# EAGLE board SparkFun_AzureWave_Module_Thing_Plus_AW-CU488-Panel (EAGLE 9.6.2), part 1 of 3
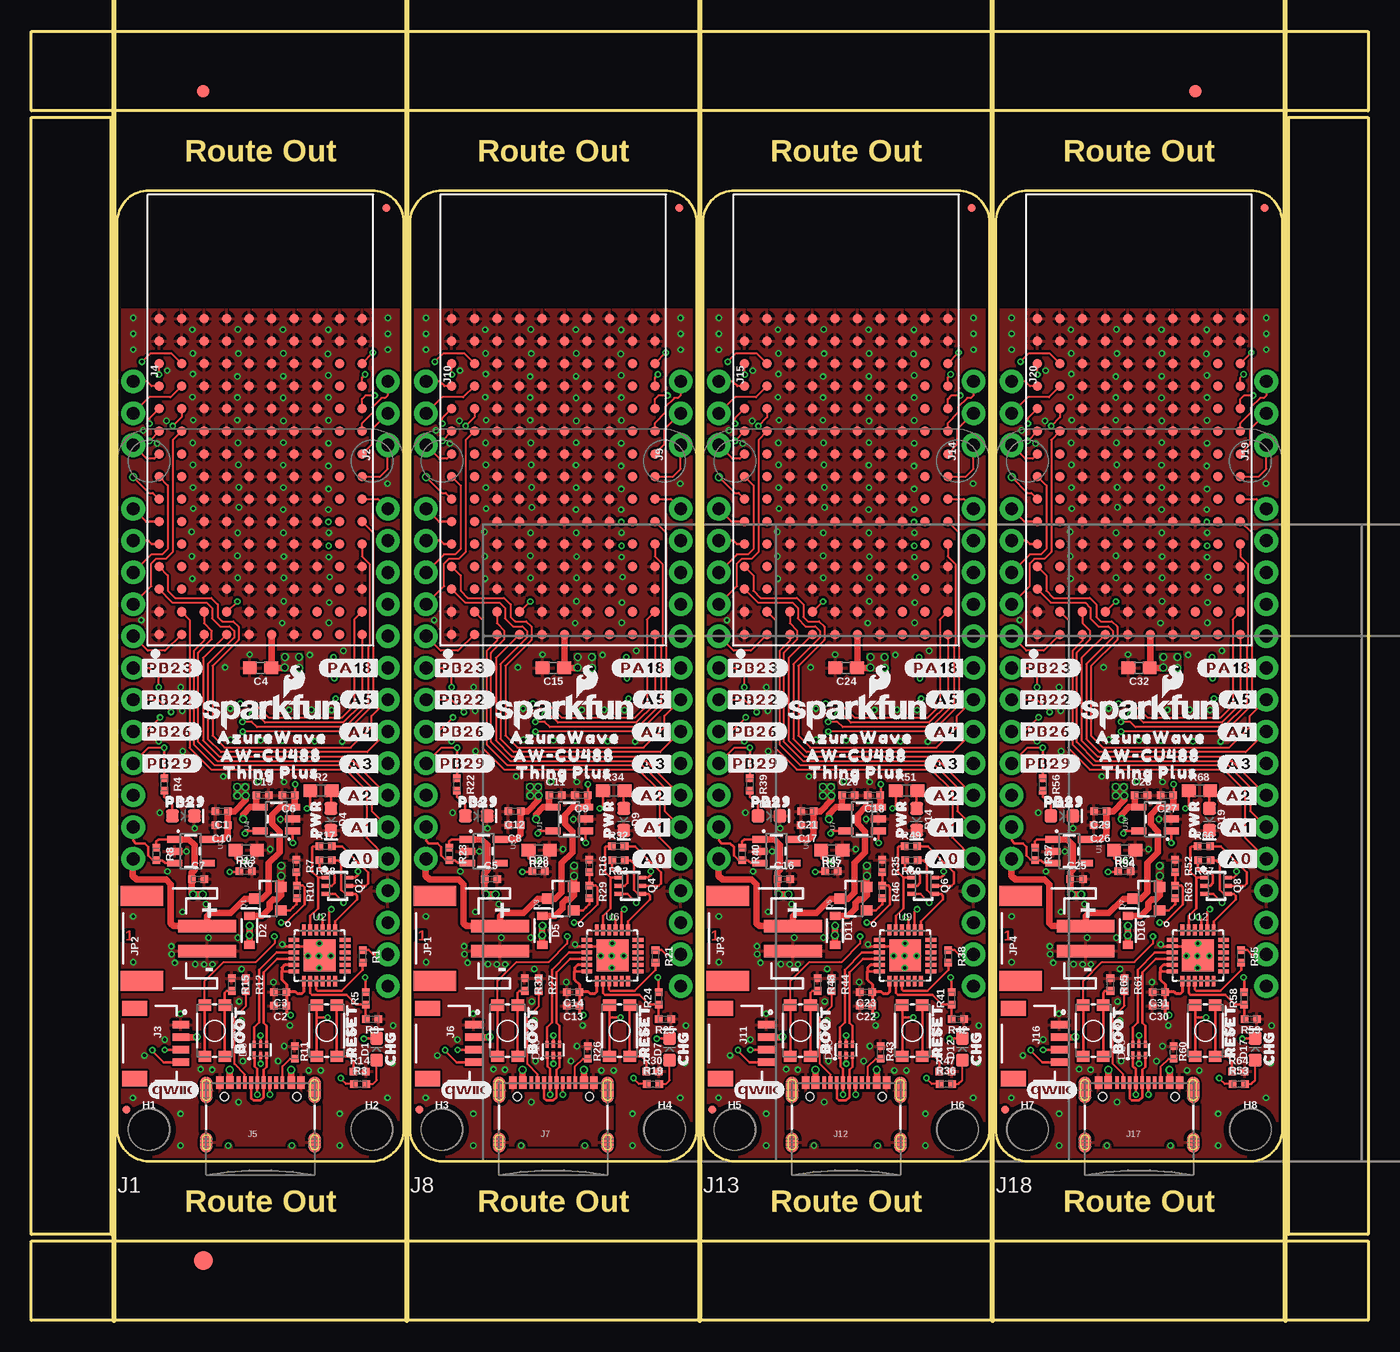
[diagram p0: board, top side]
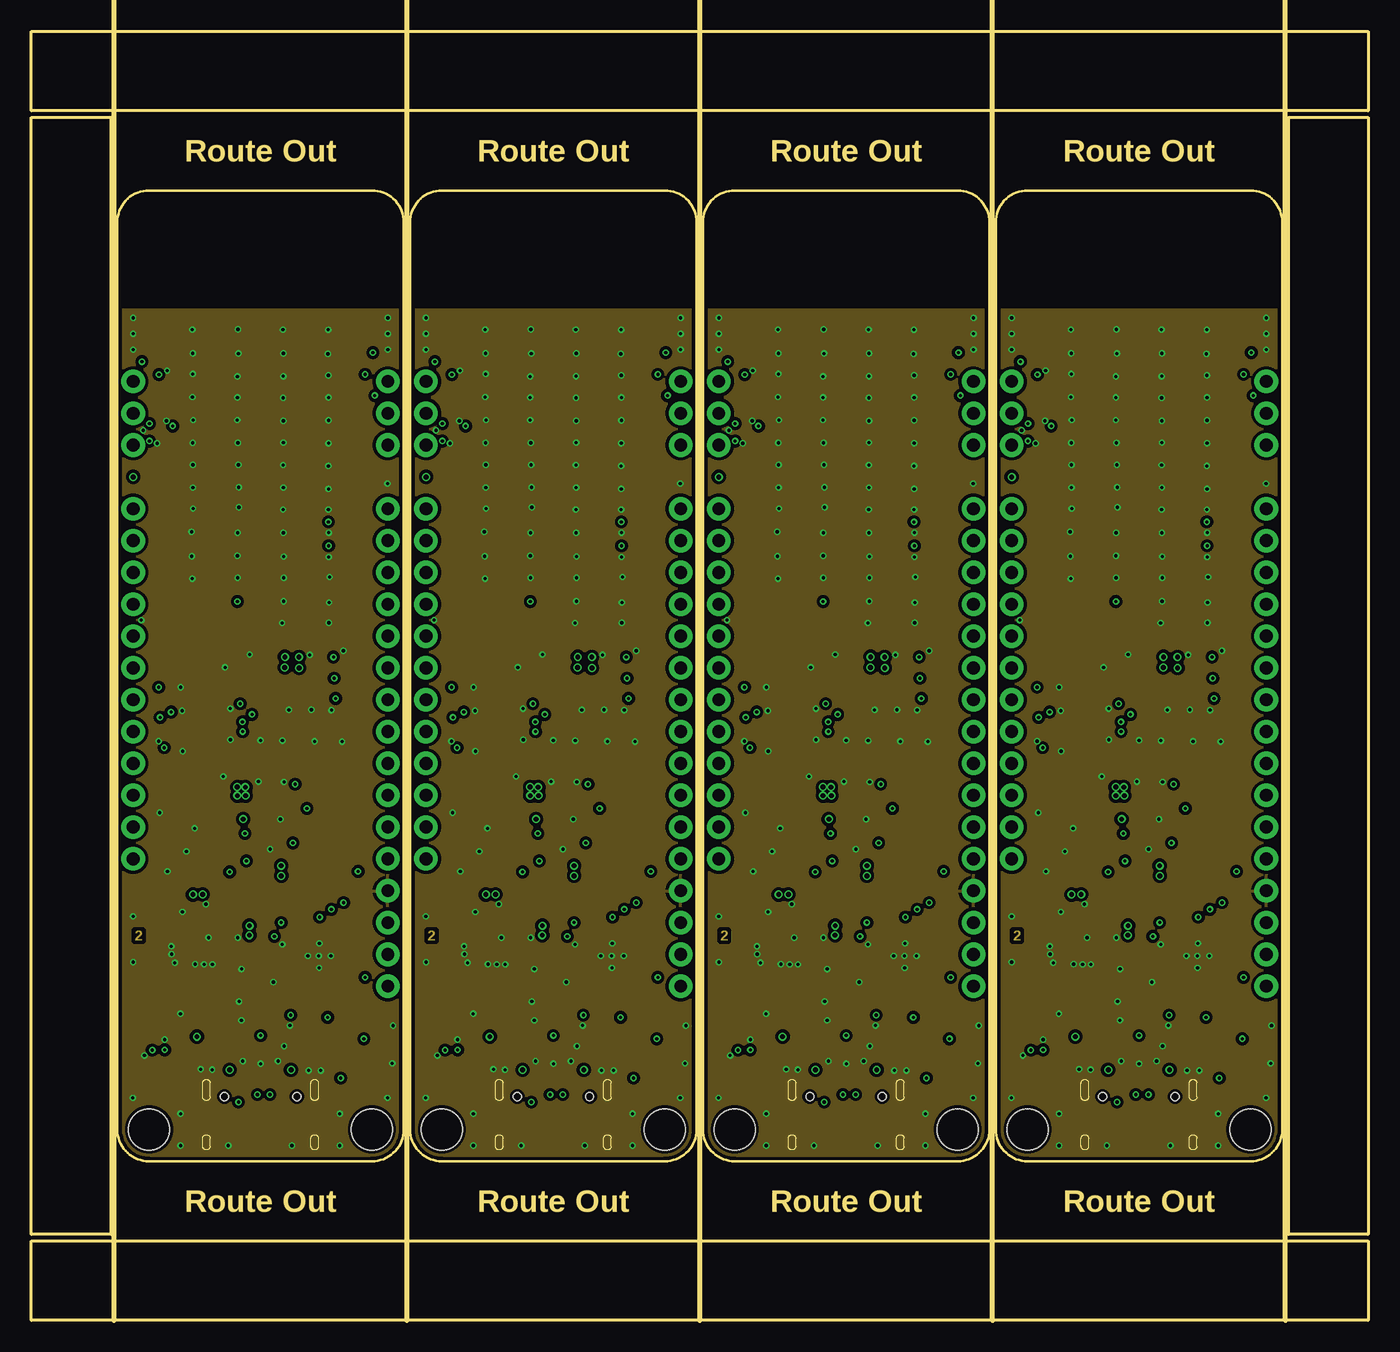
[diagram p1: board, inner layer Route2]
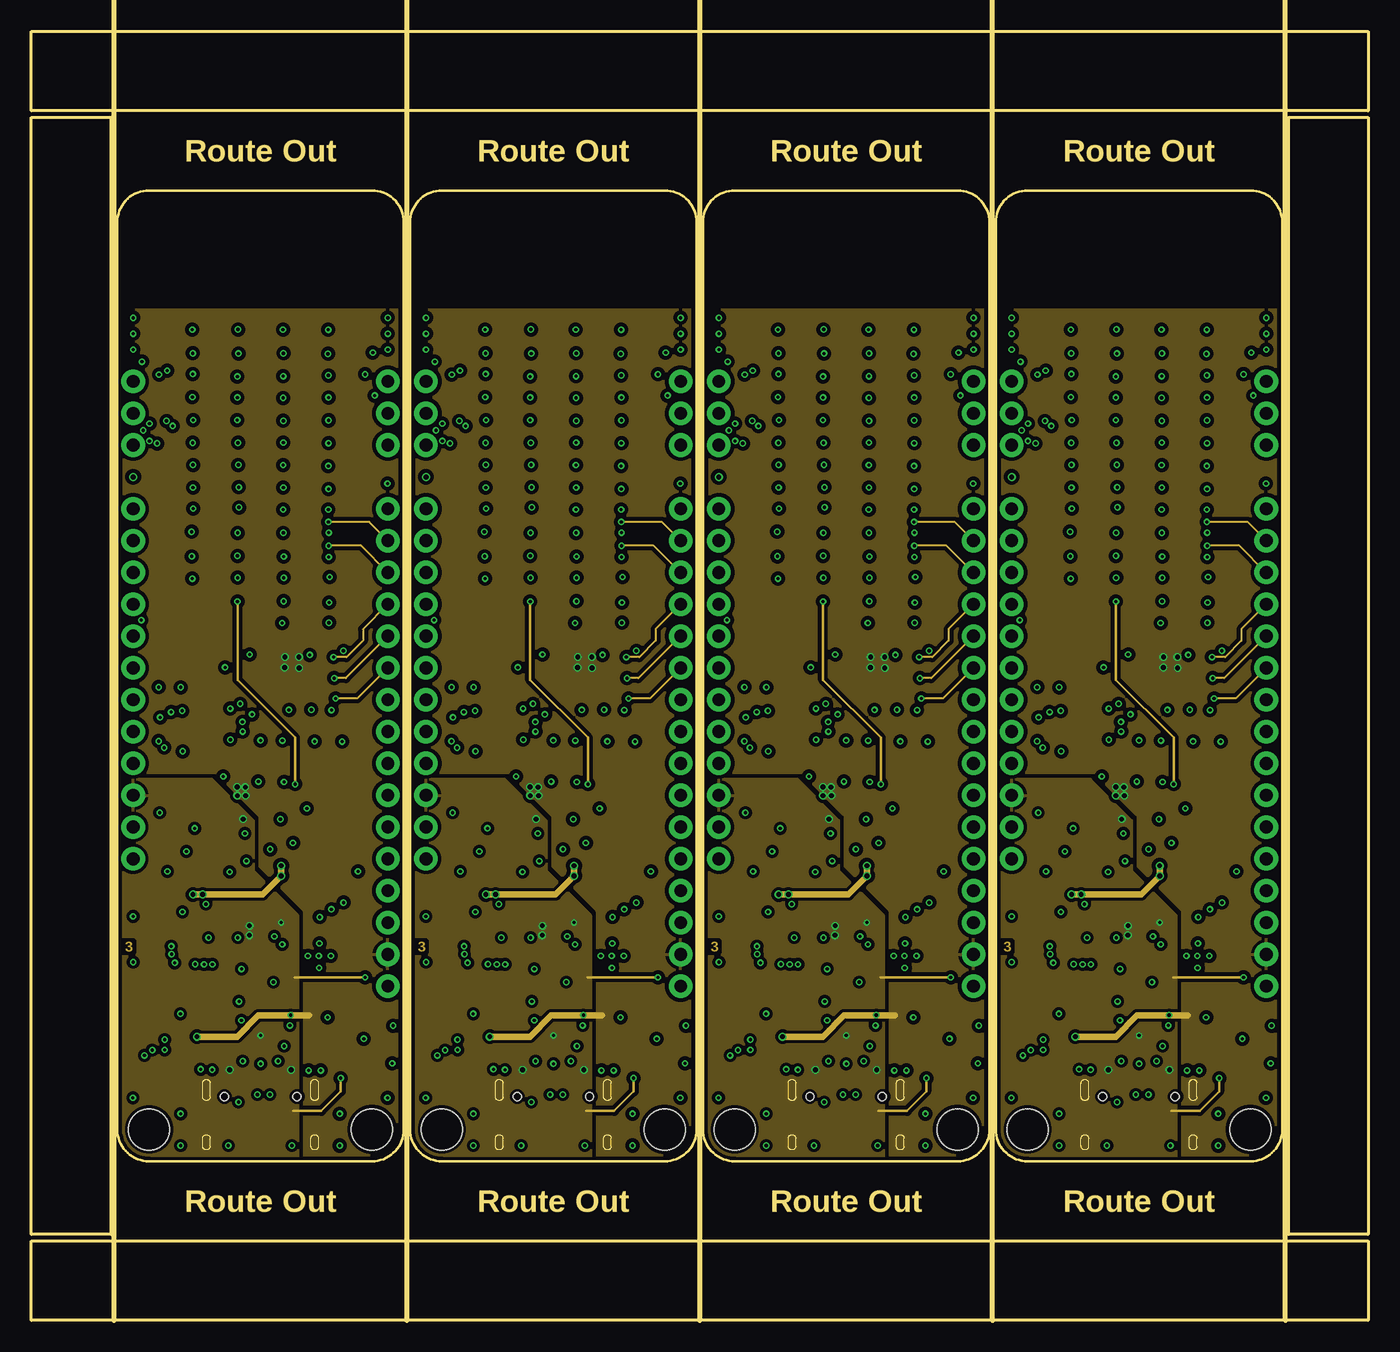
[diagram p2: board, inner layer Route15]
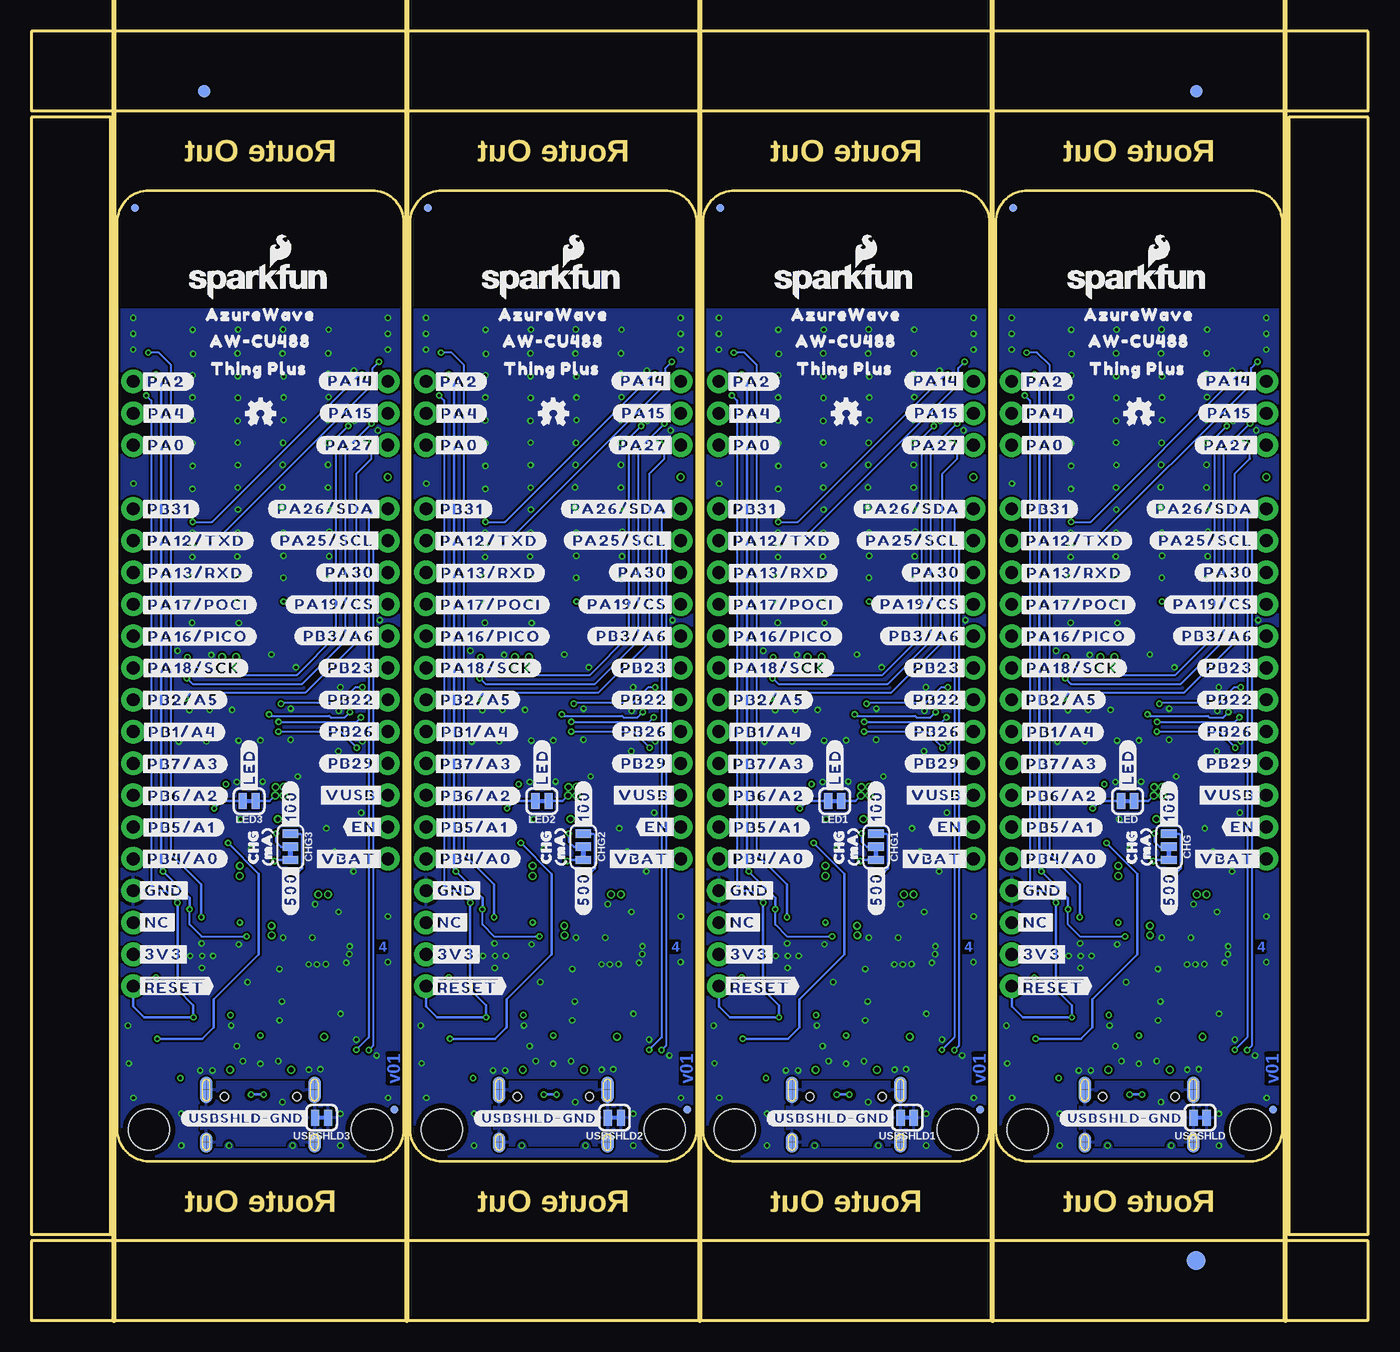
[diagram p3: board, bottom side, seen from below]

Size 106.68 x 102.87 mm. Coordinates in mm from the lower left corner, seen from the top.
Outline: 29.72,15.24 29.72,87.63 arc90 27.18,90.17 9.4,90.17 arc90 6.86,87.63 6.86,15.24 arc90 9.4,12.7 27.18,12.7 arc90 29.72,15.24
Outline: 53.09,15.24 53.09,87.63 arc90 50.55,90.17 32.77,90.17 arc90 30.23,87.63 30.23,15.24 arc90 32.77,12.7 50.55,12.7 arc90 53.09,15.24
Outline: 76.45,15.24 76.45,87.63 arc90 73.91,90.17 56.13,90.17 arc90 53.59,87.63 53.59,15.24 arc90 56.13,12.7 73.91,12.7 arc90 76.45,15.24
Outline: 99.82,15.24 99.82,87.63 arc90 97.28,90.17 79.5,90.17 arc90 76.96,87.63 76.96,15.24 arc90 79.5,12.7 97.28,12.7 arc90 99.82,15.24
Outline: 0,6.35 106.68,6.35 106.68,0 0,0 0,6.35
Outline: 100.33,96.01 106.68,96.01 106.68,6.86 100.33,6.86 100.33,96.01
Outline: 0,102.87 106.68,102.87 106.68,96.52 0,96.52 0,102.87
Outline: 0,96.01 6.35,96.01 6.35,6.86 0,6.86 0,96.01
Copper layers (1*2*15*16): Top 0.035559375mm / dielectric 0.47751875mm / Route2 0.035559375mm / dielectric 0.47751875mm / Route15 0.035559375mm / dielectric 0.47751875mm / Bottom 0.035559375mm
Design rules "SparkFun_AzureWave_Module_Thing_Plus_AW-CU488": minimum track width 5mil, minimum drill 0.2mm, track to track 5mil, track to pad 5mil, pad to pad 5mil, via to via 5mil, smd to smd 5mil, copper to edge 7mil, drill to drill 7mil, minimum pad ring 5mil, minimum via ring 5mil, stop-mask expansion 2.5mil, vias tented up to drill 25mil, thermal gap 10mil
tRestrict: area 24.4,29 to 24.4,29.2; area 21.6,29 to 21.6,29.3; area 22.9,27.7 to 23.1,27.8; area 22.8,30.5 to 23.1,30.5; area 47.7,29 to 47.8,29.2; area 44.9,29 to 45,29.3; area 46.2,27.7 to 46.5,27.8; area 46.2,30.5 to 46.5,30.5; area 71.1,29 to 71.2,29.2; area 68.3,29 to 68.4,29.3; area 69.6,27.7 to 69.8,27.8; area 69.6,30.5 to 69.8,30.5; 4 more areas
Milling: 5 lines

## Footprints (pad centres in the part's own frame; a part is rotated, then mirrored left to right if it is on the bottom)
0402-TIGHT = smd 0.6 x 0.6: 1 -0.5,0; 2 0.5,0
0603 = smd 1.1 x 1: 1 -0.85,0; 2 0.85,0
SMT-JUMPER_3_1-NC_TRACE_SILK = smd 0.66 x 1.27: 1 -1.041,0; 2 0,0; 3 1.041,0
LED-0603 = smd 1 x 1: A -0.877,0; C 0.877,0
SOD-323 = smd 0.63 x 0.83: A 1.15,0; C -1.15,0
SOT886 = smd 0.61 x 0.25: 1 -0.405,0.5 | smd 0.56 x 0.25: 2 -0.43,0; 3 -0.43,-0.5; 4 0.43,-0.5; 5 0.43,0; 6 0.43,0.5
FIDUCIAL-1X2 = smd 1 x 1: 1 0,0
FIDUCIAL-1.5X3 = smd 1.5 x 1.5: 1 0,0
FIDUCIAL-MICRO = smd 0.635 x 0.635: 1 0,0
STAND-OFF = hole 3.302: 0,0
THING_PLUS = drill 1.016 pad 1.88: 1 1.27,52.07; 2 1.27,49.53; 3 1.27,46.99; 4 1.27,44.45; 5 1.27,41.91; 6 1.27,39.37; 7 1.27,36.83; 8 1.27,34.29; 9 1.27,31.75; 10 1.27,29.21; 11 1.27,26.67; 12 1.27,24.13; 13 21.59,52.07; 14 21.59,49.53; 15 21.59,46.99; 16 21.59,44.45; 17 21.59,41.91; 18 21.59,39.37; 19 21.59,36.83; 20 21.59,34.29; 21 21.59,31.75; 22 21.59,29.21; 23 21.59,26.67; 24 21.59,24.13; 25 21.59,21.59; 26 21.59,19.05; 27 21.59,16.51; 28 21.59,13.97
1X03_NO_SILK = drill 1.016 pad 1.88: 1 0,0; 2 2.54,0; 3 5.08,0
JST04_1MM_RA = smd 0.6 x 1.35: 1 -1.5,0; 2 -0.5,0; 3 0.5,0; 4 1.5,0 | smd 1.2 x 2: NC1 2.8,-3.675; NC2 -2.8,-3.675
USB-C-16P-4LAYER-ISOLATED = smd 0.3 x 1: A5 -1.25,-0.34; A6 -0.25,-0.34; A7 0.25,-0.34; A8 1.25,-0.34; B5 1.75,-0.34; B6 0.75,-0.34; B7 -0.75,-0.34; B8 -1.75,-0.34 | smd 0.6 x 1: GND -3.225,-0.34; GND2 3.225,-0.34; VBUS1 -2.45,-0.34; VBUS2 2.45,-0.34 | smd 1 x 2.1: SHLD1 -4.32,-0.915; SHLD2 4.32,-0.915 | smd 1 x 2.1 bottom: SHLD3 -4.32,-0.915; SHLD4 4.32,-0.915 | smd 1 x 1.6: SHLD5 -4.32,-5.095; SHLD8 4.32,-5.095 | smd 1 x 1.6 bottom: SHLD6 -4.32,-5.095; SHLD7 4.32,-5.095 | hole 0.65: -2.89,-1.445; 2.89,-1.445
JST-2-SMD = smd 1 x 4.6: 1 -1,-3.7; 2 1,-3.7 | smd 1.6 x 3.4: NC1 -3.4,1.5; NC2 3.4,1.5
SMT-JUMPER_2_NC_TRACE_SILK = smd 0.66 x 1.27: 1 -0.521,0; 2 0.521,0
SOT23-3 = smd 0.8 x 0.9: 1 -0.95,-1; 2 0.95,-1; 3 0,1.1
SC70-6 = smd 0.3 x 0.66: 1 -0.65,-0.92; 2 0,-0.92; 3 0.65,-0.92; 4 0.65,0.92; 5 0,0.92; 6 -0.65,0.92
TACTILE_SWITCH_SMD_4.6X2.8MM = smd 0.9 x 1: 1 -2.05,-0.8; 2 2.05,-0.8; 3 2.05,0.8; 4 -2.05,0.8
TP_15TH = drill 0.381 pad 0.61: 1 0,0
SOT23-5 = smd 0.55 x 1.2: 1 -0.95,-1.3; 2 0,-1.3; 3 0.95,-1.3; 4 0.95,1.3; 5 -0.95,1.3
QFN24 = smd 0.85 x 0.3: 1 -2.05,1.25; 2 -2.05,0.75; 3 -2.05,0.25; 4 -2.05,-0.25; 5 -2.05,-0.75; 6 -2.05,-1.25; 13 2.05,-1.25; 14 2.05,-0.75; 15 2.05,-0.25; 16 2.05,0.25; 17 2.05,0.75; 18 2.05,1.25 | smd 0.3 x 0.85: 7 -1.25,-2.05; 8 -0.75,-2.05; 9 -0.25,-2.05; 10 0.25,-2.05; 11 0.75,-2.05; 12 1.25,-2.05; 19 1.25,2.05; 20 0.75,2.05; 21 0.25,2.05; 22 -0.25,2.05; 23 -0.75,2.05; 24 -1.25,2.05 | smd 2.55 x 2.55: PAD 0,0
LGA150_AW-CU488 = smd 0.75 x 0.75: A1 15.1,-8.1; A2 13.3,-8.1; A3 11.5,-8.1; A4 9.7,-8.1; A5 7.9,-8.1; A6 6.1,-8.1; A7 4.3,-8.1; A8 2.5,-8.1; A9 0.7,-8.1; A10 -1.1,-8.1; A11 -2.9,-8.1; A12 -4.7,-8.1; A13 -6.5,-8.1; A14 -8.3,-8.1; A15 -10.1,-8.1; B1 15.1,-6.3; B2 13.3,-6.3; B3 11.5,-6.3; B4 9.7,-6.3; B5 7.9,-6.3; B6 6.1,-6.3; B7 4.3,-6.3; B8 2.5,-6.3; B9 0.7,-6.3; B10 -1.1,-6.3; B11 -2.9,-6.3; B12 -4.7,-6.3; B13 -6.5,-6.3; B14 -8.3,-6.3; B15 -10.1,-6.3; C1 15.1,-4.5; C2 13.3,-4.5; C3 11.5,-4.5; C4 9.7,-4.5; C5 7.9,-4.5; C6 6.1,-4.5; C7 4.3,-4.5; C8 2.5,-4.5; C9 0.7,-4.5; C10 -1.1,-4.5; C11 -2.9,-4.5; C12 -4.7,-4.5; C13 -6.5,-4.5; C14 -8.3,-4.5; C15 -10.1,-4.5; D1 15.1,-2.7; D2 13.3,-2.7; D3 11.5,-2.7; D4 9.7,-2.7; D5 7.9,-2.7; D6 6.1,-2.7; D7 4.3,-2.7; D8 2.5,-2.7; D9 0.7,-2.7; D10 -1.1,-2.7; D11 -2.9,-2.7; D12 -4.7,-2.7; D13 -6.5,-2.7; D14 -8.3,-2.7; D15 -10.1,-2.7; E1 15.1,-0.9; E2 13.3,-0.9; E3 11.5,-0.9; E4 9.7,-0.9; E5 7.9,-0.9; E6 6.1,-0.9; E7 4.3,-0.9; E8 2.5,-0.9; E9 0.7,-0.9; E10 -1.1,-0.9; E11 -2.9,-0.9; E12 -4.7,-0.9; E13 -6.5,-0.9; E14 -8.3,-0.9; E15 -10.1,-0.9; F1 15.1,0.9; F2 13.3,0.9; F3 11.5,0.9; F4 9.7,0.9; F5 7.9,0.9; F6 6.1,0.9; F7 4.3,0.9; F8 2.5,0.9; F9 0.7,0.9; F10 -1.1,0.9; F11 -2.9,0.9; F12 -4.7,0.9; F13 -6.5,0.9; F14 -8.3,0.9; F15 -10.1,0.9; G1 15.1,2.7; G2 13.3,2.7; G3 11.5,2.7; G4 9.7,2.7; G5 7.9,2.7; G6 6.1,2.7; G7 4.3,2.7; G8 2.5,2.7; G9 0.7,2.7; G10 -1.1,2.7; G11 -2.9,2.7; G12 -4.7,2.7; G13 -6.5,2.7; G14 -8.3,2.7; G15 -10.1,2.7; H1 15.1,4.5; H2 13.3,4.5; H3 11.5,4.5; H4 9.7,4.5; H5 7.9,4.5; H6 6.1,4.5; H7 4.3,4.5; H8 2.5,4.5; H9 0.7,4.5; H10 -1.1,4.5; H11 -2.9,4.5; H12 -4.7,4.5; H13 -6.5,4.5; H14 -8.3,4.5; H15 -10.1,4.5; J1 15.1,6.3; J2 13.3,6.3; J3 11.5,6.3; J4 9.7,6.3; J5 7.9,6.3; J6 6.1,6.3; J7 4.3,6.3; J8 2.5,6.3; J9 0.7,6.3; J10 -1.1,6.3; J11 -2.9,6.3; J12 -4.7,6.3; J13 -6.5,6.3; J14 -8.3,6.3; J15 -10.1,6.3; K1 15.1,8.1; K2 13.3,8.1; K3 11.5,8.1; K4 9.7,8.1; K5 7.9,8.1; K6 6.1,8.1; K7 4.3,8.1; K8 2.5,8.1; K9 0.7,8.1; K10 -1.1,8.1; K11 -2.9,8.1; K12 -4.7,8.1; K13 -6.5,8.1; K14 -8.3,8.1; K15 -10.1,8.1

## Placement (x,y rotation side)
C1  10uF  [0402-TIGHT]  15.19,40.63 180 top
C2  0.1uF  [0402-TIGHT]  19.87,25.12 180 top
C3  4.7uF  [0402-TIGHT]  19.87,26.21 180 top
C4  10uF  [0603]  18.29,52.07 180 top
C5  1.0uF  [0402-TIGHT]  36.68,35.23 0 top
C6  4.7uF  [0402-TIGHT]  20.52,41.9 180 top
C7  1.0uF  [0402-TIGHT]  13.31,35.23 0 top
C8  1.0uF  [0402-TIGHT]  38.55,39.54 180 top
C9  4.7uF  [0402-TIGHT]  43.89,41.9 180 top
C10  1.0uF  [0402-TIGHT]  15.18,39.54 180 top
C11  4.7uF  [0402-TIGHT]  41.82,41.91 0 top
C12  10uF  [0402-TIGHT]  38.56,40.63 180 top
C13  0.1uF  [0402-TIGHT]  43.24,25.12 180 top
C14  4.7uF  [0402-TIGHT]  43.24,26.21 180 top
C15  10uF  [0603]  41.66,52.07 180 top
C16  1.0uF  [0402-TIGHT]  60.05,35.23 0 top
C17  1.0uF  [0402-TIGHT]  61.92,39.54 180 top
C18  4.7uF  [0402-TIGHT]  67.26,41.9 180 top
C19  4.7uF  [0402-TIGHT]  18.45,41.91 0 top
C20  4.7uF  [0402-TIGHT]  65.19,41.91 0 top
C21  10uF  [0402-TIGHT]  61.93,40.63 180 top
C22  0.1uF  [0402-TIGHT]  66.6,25.12 180 top
C23  4.7uF  [0402-TIGHT]  66.61,26.21 180 top
C24  10uF  [0603]  65.02,52.07 180 top
C25  1.0uF  [0402-TIGHT]  83.41,35.23 0 top
C26  1.0uF  [0402-TIGHT]  85.29,39.54 180 top
C27  4.7uF  [0402-TIGHT]  90.62,41.9 180 top
C28  4.7uF  [0402-TIGHT]  88.56,41.91 0 top
C29  10uF  [0402-TIGHT]  85.3,40.63 180 top
C30  0.1uF  [0402-TIGHT]  89.97,25.12 180 top
C31  4.7uF  [0402-TIGHT]  89.97,26.21 180 top
C32  10uF  [0603]  88.39,52.07 180 top
CHG  [SMT-JUMPER_3_1-NC_TRACE_SILK]  15.9,37.8 270 bottom
CHG1  [SMT-JUMPER_3_1-NC_TRACE_SILK]  39.27,37.8 270 bottom
CHG2  [SMT-JUMPER_3_1-NC_TRACE_SILK]  62.64,37.8 270 bottom
CHG3  [SMT-JUMPER_3_1-NC_TRACE_SILK]  86,37.8 270 bottom
D1  Yellow  [LED-0603]  27.56,21.64 90 top
D2  1A/23V/620mV  [SOD-323]  17.4,31.11 270 top
D3  BLUE  [LED-0603]  12.14,40.26 0 top
D4  RED  [LED-0603]  23.91,39.97 270 top
D5  1A/23V/620mV  [SOD-323]  40.77,31.11 270 top
D6  PRTR5V0U2F  [SOT886]  18.29,21.59 90 top
D7  Yellow  [LED-0603]  50.93,21.64 90 top
D8  BLUE  [LED-0603]  35.5,40.26 0 top
D9  RED  [LED-0603]  47.28,39.97 270 top
D10  PRTR5V0U2F  [SOT886]  41.66,21.59 90 top
D11  1A/23V/620mV  [SOD-323]  64.14,31.11 270 top
D12  Yellow  [LED-0603]  74.3,21.64 90 top
D13  BLUE  [LED-0603]  58.87,40.26 0 top
D14  RED  [LED-0603]  70.65,39.97 270 top
D15  PRTR5V0U2F  [SOT886]  65.02,21.59 90 top
D16  1A/23V/620mV  [SOD-323]  87.5,31.11 270 top
D17  Yellow  [LED-0603]  97.66,21.64 90 top
D18  BLUE  [LED-0603]  82.24,40.26 0 top
D19  RED  [LED-0603]  94.01,39.97 270 top
D20  PRTR5V0U2F  [SOT886]  88.39,21.59 90 top
E$1  [FIDUCIAL-1X2]  13.72,98.11 0 top
E$2  [FIDUCIAL-1X2]  13.72,98.11 0 bottom
E$3  [FIDUCIAL-1X2]  92.9,98.11 0 top
E$4  [FIDUCIAL-1X2]  92.9,98.11 0 bottom
E$5  [FIDUCIAL-1.5X3]  13.72,4.76 0 top
E$6  [FIDUCIAL-1.5X3]  13.72,4.76 0 bottom
FD1  FIDUCIALUFIDUCIAL  [FIDUCIAL-MICRO]  28.32,88.77 0 top
FD2  FIDUCIALUFIDUCIAL  [FIDUCIAL-MICRO]  28.32,88.77 0 bottom
FD3  FIDUCIALUFIDUCIAL  [FIDUCIAL-MICRO]  7.6,16.84 0 top
FD4  FIDUCIALUFIDUCIAL  [FIDUCIAL-MICRO]  7.6,16.84 0 bottom
FD5  FIDUCIALUFIDUCIAL  [FIDUCIAL-MICRO]  51.69,88.77 0 top
FD6  FIDUCIALUFIDUCIAL  [FIDUCIAL-MICRO]  51.69,88.77 0 bottom
FD7  FIDUCIALUFIDUCIAL  [FIDUCIAL-MICRO]  30.97,16.84 0 top
FD8  FIDUCIALUFIDUCIAL  [FIDUCIAL-MICRO]  30.97,16.84 0 bottom
FD9  FIDUCIALUFIDUCIAL  [FIDUCIAL-MICRO]  75.06,88.77 0 top
FD10  FIDUCIALUFIDUCIAL  [FIDUCIAL-MICRO]  75.06,88.77 0 bottom
FD11  FIDUCIALUFIDUCIAL  [FIDUCIAL-MICRO]  54.34,16.84 0 top
FD12  FIDUCIALUFIDUCIAL  [FIDUCIAL-MICRO]  54.34,16.84 0 bottom
FD13  FIDUCIALUFIDUCIAL  [FIDUCIAL-MICRO]  98.42,88.77 0 top
FD14  FIDUCIALUFIDUCIAL  [FIDUCIAL-MICRO]  98.42,88.77 0 bottom
FD15  FIDUCIALUFIDUCIAL  [FIDUCIAL-MICRO]  77.71,16.84 0 top
FD16  FIDUCIALUFIDUCIAL  [FIDUCIAL-MICRO]  77.71,16.84 0 bottom
H1  STAND-OFF  [STAND-OFF]  9.4,15.24 0 top
H2  STAND-OFF  [STAND-OFF]  27.18,15.24 0 top
H3  STAND-OFF  [STAND-OFF]  32.77,15.24 0 top
H4  STAND-OFF  [STAND-OFF]  50.55,15.24 0 top
H5  STAND-OFF  [STAND-OFF]  56.13,15.24 0 top
H6  STAND-OFF  [STAND-OFF]  73.91,15.24 0 top
H7  STAND-OFF  [STAND-OFF]  79.5,15.24 0 top
H8  STAND-OFF  [STAND-OFF]  97.28,15.24 0 top
J1  THING_PLUS  [THING_PLUS]  6.86,12.7 0 top
J2  [1X03_NO_SILK]  28.45,69.85 90 top
J3  QWIIC_RA  [JST04_1MM_RA]  11.94,22.1 270 top
J4  [1X03_NO_SILK]  8.13,74.93 270 top
J5  USB-C  [USB-C-16P-4LAYER-ISOLATED]  18.29,19.3 0 top
J6  QWIIC_RA  [JST04_1MM_RA]  35.31,22.1 270 top
J7  USB-C  [USB-C-16P-4LAYER-ISOLATED]  41.66,19.3 0 top
J8  THING_PLUS  [THING_PLUS]  30.23,12.7 0 top
J9  [1X03_NO_SILK]  51.82,69.85 90 top
J10  [1X03_NO_SILK]  31.5,74.93 270 top
J11  QWIIC_RA  [JST04_1MM_RA]  58.67,22.1 270 top
J12  USB-C  [USB-C-16P-4LAYER-ISOLATED]  65.02,19.3 0 top
J13  THING_PLUS  [THING_PLUS]  53.59,12.7 0 top
J14  [1X03_NO_SILK]  75.18,69.85 90 top
J15  [1X03_NO_SILK]  54.86,74.93 270 top
J16  QWIIC_RA  [JST04_1MM_RA]  82.04,22.1 270 top
J17  USB-C  [USB-C-16P-4LAYER-ISOLATED]  88.39,19.3 0 top
J18  THING_PLUS  [THING_PLUS]  76.96,12.7 0 top
J19  [1X03_NO_SILK]  98.55,69.85 90 top
J20  [1X03_NO_SILK]  78.23,74.93 270 top
JP1  LiPo  [JST-2-SMD]  33.71,30.48 90 top
JP2  LiPo  [JST-2-SMD]  10.34,30.48 90 top
JP3  LiPo  [JST-2-SMD]  57.07,30.48 90 top
JP4  LiPo  [JST-2-SMD]  80.44,30.48 90 top
LED  [SMT-JUMPER_2_NC_TRACE_SILK]  19.19,41.44 180 bottom
LED1  [SMT-JUMPER_2_NC_TRACE_SILK]  42.56,41.44 180 bottom
LED2  [SMT-JUMPER_2_NC_TRACE_SILK]  65.93,41.44 180 bottom
LED3  [SMT-JUMPER_2_NC_TRACE_SILK]  89.3,41.44 180 bottom
LOGO1  OSHW-LOGOMINI  [OSHW-LOGO-MINI]  41.66,72.39 0 bottom
LOGO2  OSHW-LOGOMINI  [OSHW-LOGO-MINI]  18.29,72.39 0 bottom
LOGO3  SFE_LOGO_NAME_FLAME.1_INCH  [SFE_LOGO_NAME_FLAME_.1]  18.42,82.93 0 bottom
LOGO4  FOUR_LAYER_WARNING  [FOUR_LAYER_WARNING]  37.34,52.07 0 top
LOGO5  SFE_LOGO_NAME_FLAME.1_INCH  [SFE_LOGO_NAME_FLAME_.1]  19.25,48.59 0 top
LOGO6  QWIIC_LOGO_4MM  [QWIIC_4MM]  11.36,18.37 0 top
LOGO7  SFE_LOGO_NAME_FLAME.1_INCH  [SFE_LOGO_NAME_FLAME_.1]  41.79,82.93 0 bottom
LOGO8  FOUR_LAYER_WARNING  [FOUR_LAYER_WARNING]  60.71,52.07 0 top
LOGO9  QWIIC_LOGO_4MM  [QWIIC_4MM]  34.73,18.37 0 top
LOGO10  SFE_LOGO_NAME_FLAME.1_INCH  [SFE_LOGO_NAME_FLAME_.1]  42.61,48.59 0 top
LOGO11  OSHW-LOGOMINI  [OSHW-LOGO-MINI]  65.02,72.39 0 bottom
LOGO12  SFE_LOGO_NAME_FLAME.1_INCH  [SFE_LOGO_NAME_FLAME_.1]  65.16,82.93 0 bottom
LOGO13  FOUR_LAYER_WARNING  [FOUR_LAYER_WARNING]  84.07,52.07 0 top
LOGO14  QWIIC_LOGO_4MM  [QWIIC_4MM]  58.1,18.37 0 top
LOGO15  SFE_LOGO_NAME_FLAME.1_INCH  [SFE_LOGO_NAME_FLAME_.1]  65.98,48.59 0 top
LOGO16  OSHW-LOGOMINI  [OSHW-LOGO-MINI]  88.39,72.39 0 bottom
LOGO17  SFE_LOGO_NAME_FLAME.1_INCH  [SFE_LOGO_NAME_FLAME_.1]  88.53,82.93 0 bottom
LOGO18  FOUR_LAYER_WARNING  [FOUR_LAYER_WARNING]  107.44,52.07 0 top
LOGO19  QWIIC_LOGO_4MM  [QWIIC_4MM]  81.47,18.37 0 top
LOGO20  SFE_LOGO_NAME_FLAME.1_INCH  [SFE_LOGO_NAME_FLAME_.1]  89.35,48.59 0 top
Q1  3.1A/30V/105mΩ  [SOT23-3]  18.92,33.66 90 top
Q2  MBT3904DW1T1  [SC70-6]  24.43,34.68 270 top
Q3  3.1A/30V/105mΩ  [SOT23-3]  42.29,33.66 90 top
Q4  MBT3904DW1T1  [SC70-6]  47.8,34.68 270 top
Q5  3.1A/30V/105mΩ  [SOT23-3]  65.66,33.66 90 top
Q6  MBT3904DW1T1  [SC70-6]  71.17,34.68 270 top
Q7  3.1A/30V/105mΩ  [SOT23-3]  89.03,33.66 90 top
Q8  MBT3904DW1T1  [SC70-6]  94.54,34.68 270 top
R1  10k  [0402-TIGHT]  26.44,29.05 270 top
R2  4.7k  [0603]  23.11,42.29 0 top
R3  1k  [0402-TIGHT]  26.25,18.86 0 top
R4  1k  [0402-TIGHT]  10.6,42.77 270 top
R5  22k  [0402-TIGHT]  26.69,25.71 90 top
R6  2.0k  [0603]  17.15,37.53 180 top
R7  10k  [0402-TIGHT]  21.17,36.27 270 top
R8  100k  [0402-TIGHT]  9.98,37.21 270 top
R9  33k  [0402-TIGHT]  27.2,24.05 180 top
R10  100  [0402-TIGHT]  21.17,34.2 270 top
R11  5.1k  [0402-TIGHT]  21.03,21.39 270 top
R12  5.1k  [0402-TIGHT]  17.14,26.79 270 top
R13  10k  [0402-TIGHT]  17.12,35.84 0 top
R14  10k  [0402-TIGHT]  26.21,19.87 0 top
R15  1k  [0402-TIGHT]  16,26.8 270 top
R16  10k  [0402-TIGHT]  44.54,36.27 270 top
R17  10k  [0402-TIGHT]  23.47,37.83 0 top
R18  10k  [0402-TIGHT]  23.49,36.72 180 top
R19  1k  [0402-TIGHT]  49.62,18.86 0 top
R20  2.0k  [0603]  40.52,37.53 180 top
R21  10k  [0402-TIGHT]  49.81,29.05 270 top
R22  1k  [0402-TIGHT]  33.97,42.77 270 top
R23  100k  [0402-TIGHT]  33.35,37.21 270 top
R24  22k  [0402-TIGHT]  50.06,25.71 90 top
R25  33k  [0402-TIGHT]  50.56,24.05 180 top
R26  5.1k  [0402-TIGHT]  44.4,21.39 270 top
R27  5.1k  [0402-TIGHT]  40.51,26.79 270 top
R28  10k  [0402-TIGHT]  40.49,35.84 0 top
R29  100  [0402-TIGHT]  44.54,34.2 270 top
R30  10k  [0402-TIGHT]  49.58,19.87 0 top
R31  1k  [0402-TIGHT]  39.37,26.8 270 top
R32  10k  [0402-TIGHT]  46.84,37.83 0 top
R33  10k  [0402-TIGHT]  46.86,36.72 180 top
R34  4.7k  [0603]  46.48,42.29 0 top
R35  10k  [0402-TIGHT]  67.9,36.27 270 top
R36  1k  [0402-TIGHT]  72.98,18.86 0 top
R37  2.0k  [0603]  63.89,37.53 180 top
R38  10k  [0402-TIGHT]  73.18,29.05 270 top
R39  1k  [0402-TIGHT]  57.34,42.77 270 top
R40  100k  [0402-TIGHT]  56.72,37.21 270 top
R41  22k  [0402-TIGHT]  73.43,25.71 90 top
R42  33k  [0402-TIGHT]  73.93,24.05 180 top
R43  5.1k  [0402-TIGHT]  67.77,21.39 270 top
R44  5.1k  [0402-TIGHT]  63.87,26.79 270 top
R45  10k  [0402-TIGHT]  63.86,35.84 0 top
R46  100  [0402-TIGHT]  67.91,34.2 270 top
R47  10k  [0402-TIGHT]  72.95,19.87 0 top
R48  1k  [0402-TIGHT]  62.74,26.8 270 top
R49  10k  [0402-TIGHT]  70.21,37.83 0 top
R50  10k  [0402-TIGHT]  70.22,36.72 180 top
R51  4.7k  [0603]  69.85,42.29 0 top
R52  10k  [0402-TIGHT]  91.27,36.27 270 top
R53  1k  [0402-TIGHT]  96.35,18.86 0 top
R54  2.0k  [0603]  87.26,37.53 180 top
R55  10k  [0402-TIGHT]  96.55,29.05 270 top
R56  1k  [0402-TIGHT]  80.71,42.77 270 top
R57  100k  [0402-TIGHT]  80.09,37.21 270 top
R58  22k  [0402-TIGHT]  96.79,25.71 90 top
R59  33k  [0402-TIGHT]  97.3,24.05 180 top
R60  5.1k  [0402-TIGHT]  91.14,21.39 270 top
R61  5.1k  [0402-TIGHT]  87.24,26.79 270 top
R62  10k  [0402-TIGHT]  87.22,35.84 0 top
R63  100  [0402-TIGHT]  91.28,34.2 270 top
R64  10k  [0402-TIGHT]  96.32,19.87 0 top
R65  1k  [0402-TIGHT]  86.11,26.8 270 top
R66  10k  [0402-TIGHT]  93.57,37.83 0 top
R67  10k  [0402-TIGHT]  93.59,36.72 180 top
R68  4.7k  [0603]  93.22,42.29 0 top
S1  SW1/RESET  [TACTILE_SWITCH_SMD_4.6X2.8MM]  23.57,23.11 270 top
S2  SW2/BOOT  [TACTILE_SWITCH_SMD_4.6X2.8MM]  14.64,23.11 270 top
S3  SW1/RESET  [TACTILE_SWITCH_SMD_4.6X2.8MM]  46.94,23.11 270 top
S4  SW2/BOOT  [TACTILE_SWITCH_SMD_4.6X2.8MM]  38.01,23.11 270 top
S5  SW1/RESET  [TACTILE_SWITCH_SMD_4.6X2.8MM]  70.31,23.11 270 top
S6  SW2/BOOT  [TACTILE_SWITCH_SMD_4.6X2.8MM]  61.37,23.11 270 top
S7  SW1/RESET  [TACTILE_SWITCH_SMD_4.6X2.8MM]  93.68,23.11 270 top
S8  SW2/BOOT  [TACTILE_SWITCH_SMD_4.6X2.8MM]  84.74,23.11 270 top
TP1  [TP_15TH]  8.13,67.31 0 top
TP2  [TP_15TH]  31.5,67.31 0 top
TP3  [TP_15TH]  54.86,67.31 0 top
TP4  [TP_15TH]  78.23,67.31 0 top
U1  MCP73831  [SOT23-5]  42.93,40 90 top
U2  CP210X  [QFN24]  23,29.11 0 top
U3  AP2112K-3.3V  [SOT23-5]  12.73,37.44 270 top
U4  MCP73831  [SOT23-5]  19.56,40 90 top
U5  AP2112K-3.3V  [SOT23-5]  36.09,37.44 270 top
U6  CP210X  [QFN24]  46.37,29.11 0 top
U7  MCP73831  [SOT23-5]  66.29,40 90 top
U8  AP2112K-3.3V  [SOT23-5]  59.46,37.44 270 top
U9  CP210X  [QFN24]  69.73,29.11 0 top
U10  MCP73831  [SOT23-5]  89.66,40 90 top
U11  AP2112K-3.3V  [SOT23-5]  82.83,37.44 270 top
U12  CP210X  [QFN24]  93.1,29.11 0 top
U$1  [#PA13#RXD#19]  23.46,59.65 0 bottom
U$2  [BOOT0]  16.64,23.22 90 top
U$3  [CHG0]  18.85,37.79 90 bottom
U$4  [#500#0]  15.89,36.44 90 bottom
U$5  [#PA12#TXD#19]  23.43,62.21 0 bottom
U$6  [AZUREWAVE0]  19.23,46.52 0 top
U$7  [#PB29#0]  11.07,44.44 0 top
U$8  [AZUREWAVE0]  18.29,80.26 0 bottom
U$9  [AW#CU488_0]  18.13,78.14 0 bottom
U$10  [THING_PLUS_0]  18.23,75.95 0 bottom
U$11  [MA0]  17.76,37.86 90 bottom
U$12  [#PA0#32]  25.78,69.84 0 bottom
U$13  AW-CU488  [LGA150_AW-CU488]  18.29,69.85 270 top
U$14  [#PB31#19]  25.58,64.74 0 bottom
U$15  [#PB26#30]  11.05,47 0 top
U$16  [#PB22#30]  11.07,49.53 0 top
U$17  [#PB23#30]  11.09,52.07 0 top
U$18  [#A0#30]  26.31,36.83 0 top
U$19  [#PA4#32]  25.77,72.37 0 bottom
U$20  [#USBSHLD#GND#3]  19.43,16.13 0 bottom
U$21  [#PA2#32]  25.8,74.92 0 bottom
U$22  [#PA14#32]  11.13,74.97 0 bottom
U$23  [PWR0]  22.7,40.01 90 top
U$24  [#PA15#32]  11.07,72.4 0 bottom
U$25  [#PA26#SDA#32]  13.07,64.76 0 bottom
U$26  [#PA25#SCL#32]  12.99,62.24 0 bottom
U$27  [AW#CU488_0]  19.31,45.07 0 top
U$28  [#PA30#32]  11.18,59.68 0 bottom
U$29  [#LED#0]  19.18,44.15 90 bottom
U$30  [#PB3#A6#0]  12.04,54.6 0 bottom
U$31  [#PA19#CS#32]  12.4,57.14 0 bottom
U$32  [#GND#0]  28.23,34.3 0 bottom
U$33  [#PA27#32]  11.18,69.84 0 bottom
U$34  [#PB23#32]  11.08,52.07 0 bottom
U$35  [PB290]  12.3,41.38 0 top
U$36  [#PB22#32]  11.06,49.52 0 bottom
U$37  [#PB26#32]  11.04,46.99 0 bottom
U$38  [#PB29#32]  11.06,44.45 0 bottom
U$39  [#PA18#SCK#19]  23.62,52.06 0 bottom
U$40  [#PA16#PICO#19]  23.29,54.57 0 bottom
U$41  [#VUSB#0]  8.36,41.91 0 bottom
U$42  [#VBAT#0]  8.36,36.83 0 bottom
U$43  [#EN#0]  8.36,39.37 0 bottom
U$44  [#NC#0]  28.23,31.76 0 bottom
U$45  [#3V3#0]  28.23,29.22 0 bottom
U$46  [##RESET##0]  28.23,26.68 0 bottom
U$47  [#PA17#POCI#19]  23.29,57.1 0 bottom
U$48  [ORDERING_INSTRUCTIONS]  59.44,63.5 0 top
U$49  [CHG0]  52.03,21.71 90 top
U$50  [RESET0]  48.92,23.13 90 top
U$51  [#PB4#A0#5]  24.46,36.84 0 bottom
U$52  [#PB5#A1#5]  24.58,39.33 0 bottom
U$53  [#A1#6]  26.36,39.34 0 top
U$54  [#A2#6]  26.27,41.87 0 top
U$55  [#A3#6]  26.28,44.4 0 top
U$56  [#A4#6]  26.28,46.96 0 top
U$57  [#A5#6]  26.32,49.57 0 top
U$58  [#PA18#6]  25.46,52.07 0 top
U$59  [ORDERING_INSTRUCTIONS]  36.07,63.5 0 top
U$60  [#100#0]  15.89,39.11 90 bottom
U$61  [#PB6#A2#19]  24.45,41.86 0 bottom
U$62  [THING_PLUS_0]  19.3,43.73 0 top
U$63  [#PB7#A3#19]  24.46,44.39 0 bottom
U$64  [#VUSB#0]  31.72,41.91 0 bottom
U$65  [#PB1#A4#19]  24.52,46.95 0 bottom
U$66  [#PB2#A5#19]  24.47,49.52 0 bottom
U$67  [#VBAT#0]  31.72,36.83 0 bottom
U$68  [#EN#0]  31.72,39.37 0 bottom
U$69  [#GND#0]  51.6,34.3 0 bottom
U$70  [#NC#0]  51.6,31.76 0 bottom
U$71  [#3V3#0]  51.6,29.22 0 bottom
U$72  [##RESET##0]  51.6,26.68 0 bottom
U$73  [CHG0]  42.22,37.79 90 bottom
U$74  [MA0]  41.13,37.86 90 bottom
U$75  [#100#0]  39.26,39.11 90 bottom
U$76  [#500#0]  39.25,36.44 90 bottom
U$77  [THING_PLUS_0]  42.67,43.73 0 top
U$78  [CHG0]  28.67,21.71 90 top
U$79  [RESET0]  25.55,23.13 90 top
U$80  [AW#CU488_0]  42.67,45.07 0 top
U$81  [BOOT0]  40,23.22 90 top
U$82  [AZUREWAVE0]  42.59,46.52 0 top
U$83  [AZUREWAVE0]  41.66,80.26 0 bottom
U$84  [AW#CU488_0]  41.5,78.14 0 bottom
U$85  [THING_PLUS_0]  41.6,75.95 0 bottom
U$86  AW-CU488  [LGA150_AW-CU488]  41.66,69.85 270 top
U$87  [PB290]  35.67,41.38 0 top
U$88  [#PB4#A0#5]  47.83,36.84 0 bottom
U$89  [#PB5#A1#5]  47.95,39.33 0 bottom
U$90  [#A1#6]  49.73,39.34 0 top
U$91  [#A2#6]  49.64,41.87 0 top
U$92  [#A3#6]  49.65,44.4 0 top
U$93  [#A4#6]  49.64,46.96 0 top
U$94  [#A5#6]  49.69,49.57 0 top
U$95  [#PA18#6]  48.83,52.07 0 top
U$96  [#PB6#A2#19]  47.82,41.86 0 bottom
U$97  [#PB7#A3#19]  47.83,44.39 0 bottom
U$98  [#PB1#A4#19]  47.89,46.95 0 bottom
U$99  [#PB2#A5#19]  47.83,49.52 0 bottom
U$100  [#PA18#SCK#19]  46.98,52.06 0 bottom
U$101  [#PA16#PICO#19]  46.65,54.57 0 bottom
U$102  [#PA17#POCI#19]  46.65,57.1 0 bottom
U$103  [#PA13#RXD#19]  46.83,59.65 0 bottom
U$104  [#PA12#TXD#19]  46.79,62.21 0 bottom
U$105  [#PB31#19]  48.95,64.74 0 bottom
U$106  [#PA0#32]  49.15,69.84 0 bottom
U$107  [#PA4#32]  49.14,72.37 0 bottom
U$108  [#PA2#32]  49.17,74.92 0 bottom
U$109  [#PA14#32]  34.5,74.97 0 bottom
U$110  [#PA15#32]  34.44,72.4 0 bottom
U$111  [#PA26#SDA#32]  36.44,64.76 0 bottom
U$112  [#PA25#SCL#32]  36.36,62.24 0 bottom
U$113  [#PA30#32]  34.54,59.68 0 bottom
U$114  [#PA19#CS#32]  35.77,57.14 0 bottom
U$115  [#PA27#32]  34.55,69.84 0 bottom
U$116  [#PB23#32]  34.45,52.07 0 bottom
U$117  [#PB22#32]  34.43,49.52 0 bottom
U$118  [#PB26#32]  34.41,46.99 0 bottom
U$119  [#PB29#32]  34.43,44.45 0 bottom
U$120  [#PB29#0]  34.44,44.44 0 top
U$121  [#PB26#30]  34.42,47 0 top
U$122  [#PB22#30]  34.44,49.53 0 top
U$123  [#PB23#30]  34.46,52.07 0 top
U$124  [#A0#30]  49.68,36.83 0 top
U$125  [#USBSHLD#GND#3]  42.8,16.13 0 bottom
U$126  [PWR0]  46.07,40.01 90 top
U$127  [#LED#0]  42.54,44.15 90 bottom
U$128  [#PB3#A6#0]  35.41,54.6 0 bottom
U$129  [ORDERING_INSTRUCTIONS]  82.8,63.5 0 top
U$130  [CHG0]  75.4,21.71 90 top
U$131  [RESET0]  72.29,23.13 90 top
U$132  [#VUSB#0]  55.09,41.91 0 bottom
U$133  [#VBAT#0]  55.09,36.83 0 bottom
U$134  [#EN#0]  55.09,39.37 0 bottom
U$135  [#GND#0]  74.97,34.3 0 bottom
U$136  [#NC#0]  74.97,31.76 0 bottom
U$137  [#3V3#0]  74.97,29.22 0 bottom
U$138  [##RESET##0]  74.97,26.68 0 bottom
U$139  [CHG0]  65.59,37.79 90 bottom
U$140  [MA0]  64.5,37.86 90 bottom
U$141  [#100#0]  62.62,39.11 90 bottom
U$142  [#500#0]  62.62,36.44 90 bottom
U$143  [THING_PLUS_0]  66.03,43.73 0 top
U$144  [AW#CU488_0]  66.04,45.07 0 top
U$145  [BOOT0]  63.37,23.22 90 top
U$146  [AZUREWAVE0]  65.96,46.52 0 top
U$147  [AZUREWAVE0]  65.02,80.26 0 bottom
U$148  [AW#CU488_0]  64.86,78.14 0 bottom
U$149  [THING_PLUS_0]  64.97,75.95 0 bottom
U$150  AW-CU488  [LGA150_AW-CU488]  65.02,69.85 270 top
U$151  [PB290]  59.04,41.38 0 top
U$152  [#PB4#A0#5]  71.2,36.84 0 bottom
U$153  [#PB5#A1#5]  71.31,39.33 0 bottom
U$154  [#A1#6]  73.1,39.34 0 top
U$155  [#A2#6]  73,41.87 0 top
U$156  [#A3#6]  73.02,44.4 0 top
U$157  [#A4#6]  73.01,46.96 0 top
U$158  [#A5#6]  73.06,49.57 0 top
U$159  [#PA18#6]  72.2,52.07 0 top
U$160  [#PB6#A2#19]  71.18,41.86 0 bottom
U$161  [#PB7#A3#19]  71.2,44.39 0 bottom
U$162  [#PB1#A4#19]  71.25,46.95 0 bottom
U$163  [#PB2#A5#19]  71.2,49.52 0 bottom
U$164  [#PA18#SCK#19]  70.35,52.06 0 bottom
U$165  [#PA16#PICO#19]  70.02,54.57 0 bottom
U$166  [#PA17#POCI#19]  70.02,57.1 0 bottom
U$167  [#PA13#RXD#19]  70.2,59.65 0 bottom
U$168  [#PA12#TXD#19]  70.16,62.21 0 bottom
U$169  [#PB31#19]  72.32,64.74 0 bottom
U$170  [#PA0#32]  72.52,69.84 0 bottom
U$171  [#PA4#32]  72.51,72.37 0 bottom
U$172  [#PA2#32]  72.54,74.92 0 bottom
U$173  [#PA14#32]  57.86,74.97 0 bottom
U$174  [#PA15#32]  57.81,72.4 0 bottom
U$175  [#PA26#SDA#32]  59.81,64.76 0 bottom
U$176  [#PA25#SCL#32]  59.73,62.24 0 bottom
U$177  [#PA30#32]  57.91,59.68 0 bottom
U$178  [#PA19#CS#32]  59.14,57.14 0 bottom
U$179  [#PA27#32]  57.92,69.84 0 bottom
U$180  [#PB23#32]  57.82,52.07 0 bottom
U$181  [#PB22#32]  57.8,49.52 0 bottom
U$182  [#PB26#32]  57.78,46.99 0 bottom
U$183  [#PB29#32]  57.8,44.45 0 bottom
U$184  [#PB29#0]  57.81,44.44 0 top
U$185  [#PB26#30]  57.78,47 0 top
U$186  [#PB22#30]  57.81,49.53 0 top
U$187  [#PB23#30]  57.82,52.07 0 top
U$188  [#A0#30]  73.05,36.83 0 top
U$189  [#USBSHLD#GND#3]  66.17,16.13 0 bottom
U$190  [PWR0]  69.43,40.01 90 top
U$191  [#LED#0]  65.91,44.15 90 bottom
U$192  [#PB3#A6#0]  58.77,54.6 0 bottom
U$193  [ORDERING_INSTRUCTIONS]  106.17,63.5 0 top
U$194  [CHG0]  98.77,21.71 90 top
U$195  [RESET0]  95.66,23.13 90 top
U$196  [#VUSB#0]  78.46,41.91 0 bottom
U$197  [#VBAT#0]  78.46,36.83 0 bottom
U$198  [#EN#0]  78.46,39.37 0 bottom
U$199  [#GND#0]  98.34,34.3 0 bottom
U$200  [#NC#0]  98.34,31.76 0 bottom
U$201  [#3V3#0]  98.34,29.22 0 bottom
U$202  [##RESET##0]  98.34,26.68 0 bottom
U$203  [CHG0]  88.95,37.79 90 bottom
U$204  [MA0]  87.87,37.86 90 bottom
U$205  [#100#0]  85.99,39.11 90 bottom
U$206  [#500#0]  85.99,36.44 90 bottom
U$207  [THING_PLUS_0]  89.4,43.73 0 top
U$208  [AW#CU488_0]  89.41,45.07 0 top
U$209  [BOOT0]  86.74,23.22 90 top
U$210  [AZUREWAVE0]  89.33,46.52 0 top
U$211  [AZUREWAVE0]  88.39,80.26 0 bottom
U$212  [AW#CU488_0]  88.23,78.14 0 bottom
U$213  [THING_PLUS_0]  88.34,75.95 0 bottom
U$214  AW-CU488  [LGA150_AW-CU488]  88.39,69.85 270 top
U$215  [PB290]  82.41,41.38 0 top
U$216  [#PB4#A0#5]  94.56,36.84 0 bottom
U$217  [#PB5#A1#5]  94.68,39.33 0 bottom
U$218  [#A1#6]  96.46,39.34 0 top
U$219  [#A2#6]  96.37,41.87 0 top
U$220  [#A3#6]  96.39,44.4 0 top
U$221  [#A4#6]  96.38,46.96 0 top
U$222  [#A5#6]  96.43,49.57 0 top
U$223  [#PA18#6]  95.56,52.07 0 top
U$224  [#PB6#A2#19]  94.55,41.86 0 bottom
U$225  [#PB7#A3#19]  94.56,44.39 0 bottom
U$226  [#PB1#A4#19]  94.62,46.95 0 bottom
U$227  [#PB2#A5#19]  94.57,49.52 0 bottom
U$228  [#PA18#SCK#19]  93.72,52.06 0 bottom
U$229  [#PA16#PICO#19]  93.39,54.57 0 bottom
U$230  [#PA17#POCI#19]  93.39,57.1 0 bottom
U$231  [#PA13#RXD#19]  93.57,59.65 0 bottom
U$232  [#PA12#TXD#19]  93.53,62.21 0 bottom
U$233  [#PB31#19]  95.69,64.74 0 bottom
U$234  [#PA0#32]  95.89,69.84 0 bottom
U$235  [#PA4#32]  95.87,72.37 0 bottom
U$236  [#PA2#32]  95.91,74.92 0 bottom
U$237  [#PA14#32]  81.23,74.97 0 bottom
U$238  [#PA15#32]  81.18,72.4 0 bottom
U$239  [#PA26#SDA#32]  83.17,64.76 0 bottom
U$240  [#PA25#SCL#32]  83.1,62.24 0 bottom
U$241  [#PA30#32]  81.28,59.68 0 bottom
U$242  [#PA19#CS#32]  82.5,57.14 0 bottom
U$243  [#PA27#32]  81.29,69.84 0 bottom
U$244  [#PB23#32]  81.18,52.07 0 bottom
U$245  [#PB22#32]  81.17,49.52 0 bottom
U$246  [#PB26#32]  81.15,46.99 0 bottom
U$247  [#PB29#32]  81.16,44.45 0 bottom
U$248  [#PB29#0]  81.18,44.44 0 top
U$249  [#PB26#30]  81.15,47 0 top
U$250  [#PB22#30]  81.17,49.53 0 top
U$251  [#PB23#30]  81.19,52.07 0 top
U$252  [#A0#30]  96.42,36.83 0 top
U$253  [#USBSHLD#GND#3]  89.54,16.13 0 bottom
U$254  [PWR0]  92.8,40.01 90 top
U$255  [#LED#0]  89.28,44.15 90 bottom
U$256  [#PB3#A6#0]  82.14,54.6 0 bottom
USBSHLD  [SMT-JUMPER_2_NC_TRACE_SILK]  13.41,16.18 180 bottom
USBSHLD1  [SMT-JUMPER_2_NC_TRACE_SILK]  36.78,16.18 180 bottom
USBSHLD2  [SMT-JUMPER_2_NC_TRACE_SILK]  60.15,16.18 180 bottom
USBSHLD3  [SMT-JUMPER_2_NC_TRACE_SILK]  83.52,16.18 180 bottom

## Library data of the parts
C1 C12 C21 C29 = SparkFun-Capacitors; PROD_ID: CAP-14848
C2 C13 C22 C30 = SparkFun-Capacitors; PROD_ID: CAP-12416
C3 C6 C9 C11 C14 C18-C20 C23 C27 C28 C31 = SparkFun-Capacitors; PROD_ID: CAP-14240
C4 C15 C24 C32 = SparkFun-Capacitors; PROD_ID: CAP-11015
C5 C7 C8 C10 C16 C17 C25 C26 = SparkFun-Capacitors; PROD_ID: CAP-12417
CHG CHG1-CHG3 LED LED1-LED3 USBSHLD USBSHLD1-USBSHLD3 = SparkFun-Jumpers
D1 D7 D12 D17 = SparkFun-LED; PROD_ID: DIO-09003
D2 D5 D11 D16 = SparkFun-DiscreteSemi; PROD_ID: DIO-11623
D3 D8 D13 D18 = SparkFun-LED; PROD_ID: DIO-08575
D4 D9 D14 D19 = SparkFun-LED; PROD_ID: DIO-00819
D6 D10 D15 D20 = SparkFun-IC-Power; PROD_ID: DIO-14084
E$1-E$4 FD1-FD16 LOGO1-LOGO20 U$48 U$59 U$129 U$193 = SparkFun-Aesthetics
E$5 E$6 = SparkFun-Retired
H1-H8 = SparkFun-Hardware
J1 J8 J13 J18 = SparkFun-Boards
J2 J4 J9 J10 J14 J15 J19 J20 TP1-TP4 = SparkFun-Connectors
J3 J6 J11 J16 = SparkFun-Connectors; PROD_ID: CONN-13694
J5 J7 J12 J17 = SparkFun-Connectors; PROD_ID: CONN-14122; VALUE: USB Female Type C Connector
JP1-JP4 = SparkFun-Connectors; PROD_ID: CONN-11443
Q1 Q3 Q5 Q7 = SparkFun-DiscreteSemi; PROD_ID: TRANS-11308
Q2 Q4 Q6 Q8 = SparkFun-DiscreteSemi; PROD_ID: TRANS-13337
R1 R7 R13 R14 R16-R18 R21 R28 R30 R32 R33 R35 R38 R45 R47 R49 R50 R52 R55 R62 R64 R66 R67 = SparkFun-Resistors; PROD_ID: RES-14241
R2 R34 R51 R68 = SparkFun-Resistors; PROD_ID: RES-07857
R3 R4 R15 R19 R22 R31 R36 R39 R48 R53 R56 R65 = SparkFun-Resistors; PROD_ID: RES-14342
R5 R24 R41 R58 = SparkFun-Resistors; PROD_ID: RES-14281
R6 R20 R37 R54 = SparkFun-Resistors; PROD_ID: RES-08296
R8 R23 R40 R57 = SparkFun-Resistors; PROD_ID: RES-13495
R9 R25 R42 R59 = SparkFun-Resistors; PROD_ID: RES-15128
R10 R29 R46 R63 = SparkFun-Resistors; PROD_ID: RES-14962
R11 R12 R26 R27 R43 R44 R60 R61 = SparkFun-Resistors; PROD_ID: RES-14340
S1-S8 = SparkFun-Switches; PROD_ID: SWCH-15606
U1 U4 U7 U10 = SparkFun-IC-Power; PROD_ID: IC-09995
U2 U6 U9 U12 = SparkFun-IC-Comms; PROD_ID: IC-14020
U3 U5 U8 U11 = SparkFun-IC-Power; PROD_ID: VREG-12457; VALUE: 3.3V
U$1-U$12 U$14-U$47 U$49-U$58 U$60-U$85 U$87-U$128 U$130-U$149 U$151-U$192 U$194-U$213 U$215-U$256 = output
U$13 U$86 U$150 U$214 = temp; PROD_ID: IC-16762

## Nets
3.3V: C1.1 C2.1 C3.1 C4.1 C10.1 J1.27 J3.2 LED.1 R1.1 U2.5 U2.6 U2.7 U3.5 U$13.F1
3.3V1: C8.1 C12.1 C13.1 C14.1 C15.1 J6.2 J8.27 LED1.1 R21.1 U5.5 U6.5 U6.6 U6.7 U$86.F1
3.3V2: C17.1 C21.1 C22.1 C23.1 C24.1 J11.2 J13.27 LED2.1 R38.1 U8.5 U9.5 U9.6 U9.7 U$150.F1
3.3V3: C26.1 C29.1 C30.1 C31.1 C32.1 J16.2 J18.27 LED3.1 R55.1 U11.5 U12.5 U12.6 U12.7 U$214.F1
CC1: J5.A5 R12.2
CC2: J5.B5 R11.2
CC3: J7.B5 R26.2
CC4: J7.A5 R27.2
CC5: J12.B5 R43.2
CC6: J12.A5 R44.2
CC7: J17.B5 R60.2
CC8: J17.A5 R61.2
CHG: D1.C U4.1
CHG1: D7.C U1.1
CHG2: D12.C U7.1
CHG3: D17.C U10.1
CHIP_EN: J1.28 Q2.3 S1.1 S1.2 U$13.K11
CHIP_EN1: J8.28 Q4.3 S3.1 S3.2 U$86.K11
CHIP_EN2: J13.28 Q6.3 S5.1 S5.2 U$150.K11
CHIP_EN3: J18.28 Q8.3 S7.1 S7.2 U$214.K11
DTR: Q2.1 R17.1 U2.23
DTR1: Q4.1 R32.1 U6.23
DTR2: Q6.1 R49.1 U9.23
DTR3: Q8.1 R66.1 U12.23
EN: J1.11 R8.2 U3.3
EN1: J8.11 R23.2 U5.3
EN2: J13.11 R40.2 U8.3
EN3: J18.11 R57.2 U11.3
GND: C1.2 C2.2 C3.2 C4.2 C6.2 C7.2 C10.2 C19.2 D3.C D4.C D6.2 J1.25 J3.1 J5.GND J5.GND2 JP2.1 R6.1 R7.1 R9.1 R11.1 R12.1 R13.2 R14.2 R15.1 U2.2 U2.PAD U3.2 U4.2 U$13.A1 U$13.A2 U$13.A14 U$13.A15 U$13.B14 U$13.B15 U$13.C3 U$13.C4 U$13.C5 U$13.C6 U$13.C7 U$13.C8 U$13.C9 U$13.C10 U$13.C11 U$13.C12 U$13.C13 U$13.C14 U$13.C15 U$13.D3 U$13.D4 U$13.D5 U$13.D6 U$13.D7 U$13.D8 U$13.D9 U$13.D10 U$13.D11 U$13.D12 U$13.D13 U$13.D14 U$13.D15 U$13.E1 U$13.E2 U$13.E3 U$13.E4 U$13.E5 U$13.E6 U$13.E7 U$13.E8 U$13.E9 U$13.E10 U$13.E11 U$13.E12 U$13.E13 U$13.E14 U$13.E15 U$13.F2 U$13.F3 U$13.F4 U$13.F5 U$13.F6 U$13.F7 U$13.F8 U$13.F9 U$13.F10 U$13.F11 U$13.F12 U$13.F13 U$13.F14 U$13.F15 U$13.G1 U$13.G2 U$13.G3 U$13.G4 U$13.G5 U$13.G6 U$13.G7 U$13.G8 U$13.G9 U$13.G10 U$13.G11 U$13.G12 U$13.G13 U$13.G14 U$13.G15 U$13.H3 U$13.H4 U$13.H5 U$13.H6 U$13.H7 U$13.H8 U$13.H9 U$13.H10 U$13.H11 U$13.H12 U$13.H13 U$13.H14 U$13.H15 U$13.J14 U$13.J15 U$13.K3 U$13.K4 U$13.K14 U$13.K15 USBSHLD.1
GND1: C5.2 C8.2 C9.2 C11.2 C12.2 C13.2 C14.2 C15.2 D8.C D9.C D10.2 J6.1 J7.GND J7.GND2 J8.25 JP1.1 R16.1 R20.1 R25.1 R26.1 R27.1 R28.2 R30.2 R31.1 U1.2 U5.2 U6.2 U6.PAD U$86.A1 U$86.A2 U$86.A14 U$86.A15 U$86.B14 U$86.B15 U$86.C3 U$86.C4 U$86.C5 U$86.C6 U$86.C7 U$86.C8 U$86.C9 U$86.C10 U$86.C11 U$86.C12 U$86.C13 U$86.C14 U$86.C15 U$86.D3 U$86.D4 U$86.D5 U$86.D6 U$86.D7 U$86.D8 U$86.D9 U$86.D10 U$86.D11 U$86.D12 U$86.D13 U$86.D14 U$86.D15 U$86.E1 U$86.E2 U$86.E3 U$86.E4 U$86.E5 U$86.E6 U$86.E7 U$86.E8 U$86.E9 U$86.E10 U$86.E11 U$86.E12 U$86.E13 U$86.E14 U$86.E15 U$86.F2 U$86.F3 U$86.F4 U$86.F5 U$86.F6 U$86.F7 U$86.F8 U$86.F9 U$86.F10 U$86.F11 U$86.F12 U$86.F13 U$86.F14 U$86.F15 U$86.G1 U$86.G2 U$86.G3 U$86.G4 U$86.G5 U$86.G6 U$86.G7 U$86.G8 U$86.G9 U$86.G10 U$86.G11 U$86.G12 U$86.G13 U$86.G14 U$86.G15 U$86.H3 U$86.H4 U$86.H5 U$86.H6 U$86.H7 U$86.H8 U$86.H9 U$86.H10 U$86.H11 U$86.H12 U$86.H13 U$86.H14 U$86.H15 U$86.J14 U$86.J15 U$86.K3 U$86.K4 U$86.K14 U$86.K15 USBSHLD1.1
GND2: C16.2 C17.2 C18.2 C20.2 C21.2 C22.2 C23.2 C24.2 D13.C D14.C D15.2 J11.1 J12.GND J12.GND2 J13.25 JP3.1 R35.1 R37.1 R42.1 R43.1 R44.1 R45.2 R47.2 R48.1 U7.2 U8.2 U9.2 U9.PAD U$150.A1 U$150.A2 U$150.A14 U$150.A15 U$150.B14 U$150.B15 U$150.C3 U$150.C4 U$150.C5 U$150.C6 U$150.C7 U$150.C8 U$150.C9 U$150.C10 U$150.C11 U$150.C12 U$150.C13 U$150.C14 U$150.C15 U$150.D3 U$150.D4 U$150.D5 U$150.D6 U$150.D7 U$150.D8 U$150.D9 U$150.D10 U$150.D11 U$150.D12 U$150.D13 U$150.D14 U$150.D15 U$150.E1 U$150.E2 U$150.E3 U$150.E4 U$150.E5 U$150.E6 U$150.E7 U$150.E8 U$150.E9 U$150.E10 U$150.E11 U$150.E12 U$150.E13 U$150.E14 U$150.E15 U$150.F2 U$150.F3 U$150.F4 U$150.F5 U$150.F6 U$150.F7 U$150.F8 U$150.F9 U$150.F10 U$150.F11 U$150.F12 U$150.F13 U$150.F14 U$150.F15 U$150.G1 U$150.G2 U$150.G3 U$150.G4 U$150.G5 U$150.G6 U$150.G7 U$150.G8 U$150.G9 U$150.G10 U$150.G11 U$150.G12 U$150.G13 U$150.G14 U$150.G15 U$150.H3 U$150.H4 U$150.H5 U$150.H6 U$150.H7 U$150.H8 U$150.H9 U$150.H10 U$150.H11 U$150.H12 U$150.H13 U$150.H14 U$150.H15 U$150.J14 U$150.J15 U$150.K3 U$150.K4 U$150.K14 U$150.K15 USBSHLD2.1
GND3: C25.2 C26.2 C27.2 C28.2 C29.2 C30.2 C31.2 C32.2 D18.C D19.C D20.2 J16.1 J17.GND J17.GND2 J18.25 JP4.1 R52.1 R54.1 R59.1 R60.1 R61.1 R62.2 R64.2 R65.1 U10.2 U11.2 U12.2 U12.PAD U$214.A1 U$214.A2 U$214.A14 U$214.A15 U$214.B14 U$214.B15 U$214.C3 U$214.C4 U$214.C5 U$214.C6 U$214.C7 U$214.C8 U$214.C9 U$214.C10 U$214.C11 U$214.C12 U$214.C13 U$214.C14 U$214.C15 U$214.D3 U$214.D4 U$214.D5 U$214.D6 U$214.D7 U$214.D8 U$214.D9 U$214.D10 U$214.D11 U$214.D12 U$214.D13 U$214.D14 U$214.D15 U$214.E1 U$214.E2 U$214.E3 U$214.E4 U$214.E5 U$214.E6 U$214.E7 U$214.E8 U$214.E9 U$214.E10 U$214.E11 U$214.E12 U$214.E13 U$214.E14 U$214.E15 U$214.F2 U$214.F3 U$214.F4 U$214.F5 U$214.F6 U$214.F7 U$214.F8 U$214.F9 U$214.F10 U$214.F11 U$214.F12 U$214.F13 U$214.F14 U$214.F15 U$214.G1 U$214.G2 U$214.G3 U$214.G4 U$214.G5 U$214.G6 U$214.G7 U$214.G8 U$214.G9 U$214.G10 U$214.G11 U$214.G12 U$214.G13 U$214.G14 U$214.G15 U$214.H3 U$214.H4 U$214.H5 U$214.H6 U$214.H7 U$214.H8 U$214.H9 U$214.H10 U$214.H11 U$214.H12 U$214.H13 U$214.H14 U$214.H15 U$214.J14 U$214.J15 U$214.K3 U$214.K4 U$214.K14 U$214.K15 USBSHLD3.1
LP_UART_RXD: J1.15 U$13.B13
LP_UART_RXD1: J8.15 U$86.B13
LP_UART_RXD2: J13.15 U$150.B13
LP_UART_RXD3: J18.15 U$214.B13
LP_UART_TXD: J1.14 U$13.A13
LP_UART_TXD1: J8.14 U$86.A13
LP_UART_TXD2: J13.14 U$150.A13
LP_UART_TXD3: J18.14 U$214.A13
N$1: R1.2 U2.9
N$2: D3.A R4.2
N$3: Q2.5 R17.2
N$4: R5.1 R9.2 U2.8
N$5: Q2.2 R18.2
N$6: D7.A R19.2
N$7: Q1.1 R10.2
N$8: R15.2 S2.3 S2.4
N$9: CHG.2 U4.5
N$10: R14.1 S1.3 S1.4
N$11: CHG.1 R13.1
N$12: LED.2 R2.1
N$13: CHG.3 R6.2
N$14: D4.A R2.2
N$15: D6.6 U2.3
N$16: D6.1 J5.A6 J5.B6
N$17: D1.A R3.2
N$18: D6.4 U2.4
N$19: D6.3 J5.A7 J5.B7
N$20: R21.2 U6.9
N$21: D8.A R22.2
N$22: R24.1 R25.2 U6.8
N$23: CHG1.2 U1.5
N$24: CHG1.1 R28.1
N$25: CHG1.3 R20.2
N$26: Q3.1 R29.2
N$27: R30.1 S3.3 S3.4
N$28: R31.2 S4.3 S4.4
N$29: Q4.5 R32.2
N$30: Q4.2 R33.2
N$31: LED1.2 R34.1
N$32: D9.A R34.2
N$33: D10.6 U6.3
N$34: D10.1 J7.A6 J7.B6
N$35: D10.4 U6.4
N$36: D10.3 J7.A7 J7.B7
N$37: D12.A R36.2
N$38: R38.2 U9.9
N$39: D13.A R39.2
N$40: R41.1 R42.2 U9.8
N$41: CHG2.2 U7.5
N$42: CHG2.1 R45.1
N$43: CHG2.3 R37.2
N$44: Q5.1 R46.2
N$45: R47.1 S5.3 S5.4
N$46: R48.2 S6.3 S6.4
N$47: Q6.5 R49.2
N$48: Q6.2 R50.2
N$49: LED2.2 R51.1
N$50: D14.A R51.2
N$51: D15.6 U9.3
N$52: D15.1 J12.A6 J12.B6
N$53: D15.4 U9.4
N$54: D15.3 J12.A7 J12.B7
N$55: D17.A R53.2
N$56: R55.2 U12.9
N$57: D18.A R56.2
N$58: R58.1 R59.2 U12.8
N$59: CHG3.2 U10.5
N$60: CHG3.1 R62.1
N$61: CHG3.3 R54.2
N$62: Q7.1 R63.2
N$63: R64.1 S7.3 S7.4
N$64: R65.2 S8.3 S8.4
N$65: Q8.5 R66.2
N$66: Q8.2 R67.2
N$67: LED3.2 R68.1
N$68: D19.A R68.2
N$69: D20.6 U12.3
N$70: D20.1 J17.A6 J17.B6
N$71: D20.4 U12.4
N$72: D20.3 J17.A7 J17.B7
PA0: J2.1 U$13.K8
PA1: J10.3 U$86.A9
PA2: J2.3 U$13.K10
PA3: J8.3 U$86.A8
PA4: J2.2 U$13.K9
PA5: J9.3 U$86.K10
PA6: J9.1 U$86.K8
PA7: J9.2 U$86.K9
PA7/UART-LOG-TXD: Q2.6 S2.1 S2.2 U2.20 U$13.K12
PA7/UART-LOG-TXD1: Q4.6 S4.1 S4.2 U6.20 U$86.K12
PA7/UART-LOG-TXD2: Q6.6 S6.1 S6.2 U9.20 U$150.K12
PA7/UART-LOG-TXD3: Q8.6 S8.1 S8.2 U12.20 U$214.K12
PA8: J10.1 U$86.A12
PA8/UART-LOG-RXD: U2.21 U$13.K13
PA8/UART-LOG-RXD1: U6.21 U$86.K13
PA8/UART-LOG-RXD2: U9.21 U$150.K13
PA8/UART-LOG-RXD3: U12.21 U$214.K13
PA9: J10.2 U$86.B12
PA10: TP2.1 U$86.A7
PA11: J15.3 U$150.A9
PA12: J13.3 U$150.A8
PA13: J14.3 U$150.K10
PA14: J4.1 U$13.A12
PA15: J4.2 U$13.B12
PA16: J14.1 U$150.K8
PA16/PICO: J1.17 U$13.A11
PA16/PICO1: J8.17 U$86.A11
PA16/PICO2: J13.17 U$150.A11
PA16/PICO3: J18.17 U$214.A11
PA17: J14.2 U$150.K9
PA17/POCI: J1.16 U$13.B11
PA17/POCI1: J8.16 U$86.B11
PA17/POCI2: J13.16 U$150.B11
PA17/POCI3: J18.16 U$214.B11
PA18: J15.1 U$150.A12
PA18/SCK: J1.18 U$13.A10
PA18/SCK1: J8.18 U$86.A10
PA18/SCK2: J13.18 U$150.A10
PA18/SCK3: J18.18 U$214.A10
PA19: J15.2 U$150.B12
PA19/CS: J1.4 U$13.B10
PA19/CS1: J8.4 U$86.B10
PA19/CS2: J13.4 U$150.B10
PA19/CS3: J18.4 U$214.B10
PA20: TP3.1 U$150.A7
PA21: J20.3 U$214.A9
PA22: J18.3 U$214.A8
PA23: J19.3 U$214.K10
PA24: J19.1 U$214.K8
PA25: J19.2 U$214.K9
PA25/SCL: J1.2 J3.4 U$13.A5
PA25/SCL1: J6.4 J8.2 U$86.A5
PA25/SCL2: J11.4 J13.2 U$150.A5
PA25/SCL3: J16.4 J18.2 U$214.A5
PA26: J20.1 U$214.A12
PA26/SDA: J1.1 J3.3 U$13.A6
PA26/SDA1: J6.3 J8.1 U$86.A6
PA26/SDA2: J11.3 J13.1 U$150.A6
PA26/SDA3: J16.3 J18.1 U$214.A6
PA27: J4.3 U$13.A9
PA28: TP1.1 U$13.A7
PA29: J20.2 U$214.B12
PA30: J1.3 U$13.A8
PA31: TP4.1 U$214.A7
PB1: J8.7 U$86.K1
PB1/A1: J8.20 U$86.A3
PB1/A2: J13.20 U$150.A3
PB1/A3: J18.20 U$214.A3
PB1/A4: J1.20 U$13.A3
PB2: J8.6 U$86.K2
PB2/A1: J8.19 U$86.A4
PB2/A2: J13.19 U$150.A4
PB2/A3: J18.19 U$214.A4
PB2/A5: J1.19 U$13.A4
PB3: J8.8 U$86.K5
PB3/A1: J8.5 U$86.B1
PB3/A2: J13.5 U$150.B1
PB3/A3: J18.5 U$214.B1
PB3/A6: J1.5 U$13.B1
PB4: J8.9 R22.1 U$86.K6
PB4/A0: J1.24 U$13.B2
PB4/A1: J8.24 U$86.B2
PB4/A2: J13.24 U$150.B2
PB4/A3: J18.24 U$214.B2
PB5: J8.13 U$86.K7
PB5/A1: J1.23 U$13.C1
PB5/A2: J8.23 U$86.C1
PB5/A3: J13.23 U$150.C1
PB5/A4: J18.23 U$214.C1
PB6: J13.7 U$150.K1
PB6/A1: J8.22 U$86.C2
PB6/A2: J1.22 U$13.C2
PB6/A3: J13.22 U$150.C2
PB6/A4: J18.22 U$214.C2
PB7: J13.6 U$150.K2
PB7/A1: J8.21 U$86.D1
PB7/A2: J13.21 U$150.D1
PB7/A3: J1.21 U$13.D1
PB7/A4: J18.21 U$214.D1
PB8: J13.8 U$150.K5
PB9: J13.9 R39.1 U$150.K6
PB10: J13.13 U$150.K7
PB11: J18.7 U$214.K1
PB12: J18.6 U$214.K2
PB13: J18.8 U$214.K5
PB14: J18.9 R56.1 U$214.K6
PB15: J18.13 U$214.K7
PB22: J1.7 U$13.K1
PB23: J1.6 U$13.K2
PB26: J1.8 U$13.K5
PB29: J1.9 R4.1 U$13.K6
PB31: J1.13 U$13.K7
RTS: Q2.4 R18.1 U2.19
RTS1: Q4.4 R33.1 U6.19
RTS2: Q6.4 R50.1 U9.19
RTS3: Q8.4 R67.1 U12.19
USB_SHLD: J5.SHLD1 J5.SHLD2 J5.SHLD3 J5.SHLD4 J5.SHLD5 J5.SHLD6 J5.SHLD7 J5.SHLD8 USBSHLD.2
USB_SHLD1: J7.SHLD1 J7.SHLD2 J7.SHLD3 J7.SHLD4 J7.SHLD5 J7.SHLD6 J7.SHLD7 J7.SHLD8 USBSHLD1.2
USB_SHLD2: J12.SHLD1 J12.SHLD2 J12.SHLD3 J12.SHLD4 J12.SHLD5 J12.SHLD6 J12.SHLD7 J12.SHLD8 USBSHLD2.2
USB_SHLD3: J17.SHLD1 J17.SHLD2 J17.SHLD3 J17.SHLD4 J17.SHLD5 J17.SHLD6 J17.SHLD7 J17.SHLD8 USBSHLD3.2
V_BATT: C6.1 J1.12 JP2.2 Q1.3 U4.3 U$13.D2
V_BATT1: C9.1 J8.12 JP1.2 Q3.3 U1.3 U$86.D2
V_BATT2: C18.1 J13.12 JP3.2 Q5.3 U7.3 U$150.D2
V_BATT3: C27.1 J18.12 JP4.2 Q7.3 U10.3 U$214.D2
V_USB: C19.1 D2.A D6.5 J1.10 J5.VBUS1 J5.VBUS2 R3.1 R5.2 R7.2 R10.1 U4.4
V_USB1: C11.1 D5.A D10.5 J7.VBUS1 J7.VBUS2 J8.10 R16.2 R19.1 R24.2 R29.1 U1.4
V_USB2: C20.1 D11.A D15.5 J12.VBUS1 J12.VBUS2 J13.10 R35.2 R36.1 R41.2 R46.1 U7.4
V_USB3: C28.1 D16.A D20.5 J17.VBUS1 J17.VBUS2 J18.10 R52.2 R53.1 R58.2 R63.1 U10.4
VIN: C7.1 D2.C Q1.2 R8.1 U3.1
VIN1: C5.1 D5.C Q3.2 R23.1 U5.1
VIN2: C16.1 D11.C Q5.2 R40.1 U8.1
VIN3: C25.1 D16.C Q7.2 R57.1 U11.1